# EAGLE board Glove Module (EAGLE 6.6.0)

Size 30 x 60 mm. Coordinates in mm from the lower left corner, seen from the top.
Outline: 14.76,0 2.24,0 arc-90 0,2.24 0,56.84 arc-90 3.16,60 26.39,60 arc-90 30,56.39 30,51 arc-53 26,44 arc88 17,34 17,2.24 arc-90 14.76,0
Copper layers (1*16): Top 0.035mm / dielectric 1.5mm / Bottom 0.035mm
Design rules "default": minimum track width 10mil, minimum drill 24mil, track to track 8mil, track to pad 8mil, pad to pad 8mil, via to via 8mil, smd to smd 8mil, copper to edge 40mil, drill to drill 8mil, minimum pad ring 10mil, minimum via ring 8mil, stop-mask expansion 4mil, vias tented up to drill 0mil, thermal gap 10mil

## Footprints (pad centres in the part's own frame; a part is rotated, then mirrored left to right if it is on the bottom)
1,6/0,9 = drill 0.914 pad 1.6 octagon: 1 0,0
EIA3216 = smd 1.4 x 1.6: A 1.4,0; C -1.4,0
0603-CAP = smd 1.1 x 1: 1 -0.85,0; 2 0.85,0
SOD523 = smd 0.7 x 0.5: A 0.7,0; C -0.6,0
LED-1206-BOTTOM = smd 1.5 x 1.6: A -1.8,0; C 1.8,0 | hole 2.3: 0,0
FIDUCIAL-1X2 = smd 1 x 1: 1 0,0
SOT23-5 = smd 0.55 x 1.1: 1 -0.95,-1.3; 2 0,-1.3; 3 0.95,-1.3; 4 0.95,1.5; 5 -0.95,1.5
SOT223 = smd 1.219 x 2.235: 1 -2.311,-3.099; 2 0,-3.099; 3 2.311,-3.099 | smd 3.6 x 2.2: 4 0,3.099
RFD22301 = smd 3.353 x 0.813: 1 0,0; 2 0,-1.27; 3 0,-2.54; 4 0,-3.81; 5 0,-5.08; 6 0,-6.35; 7 0,-7.62; 8 0,-8.89; 9 13.411,-12.675; 10 13.411,-11.405; 11 13.411,-10.135; 12 13.411,-8.865; 13 13.411,-7.595; 14 13.411,-6.325; 15 13.411,-5.055; 16 13.411,-3.785; 17 13.411,-2.515; 18 13.411,-1.245; 19 13.411,0.025
SSOP24 = smd 0.348 x 1.397: 1 -3.575,-3.656; 2 -2.925,-3.656; 3 -2.275,-3.656; 4 -1.625,-3.656; 5 -0.975,-3.656; 6 -0.325,-3.656; 7 0.325,-3.656; 8 0.975,-3.656; 9 1.625,-3.656; 10 2.275,-3.656; 11 2.925,-3.656; 12 3.575,-3.656; 13 3.575,3.656; 14 2.925,3.656; 15 2.275,3.656; 16 1.625,3.656; 17 0.975,3.656; 18 0.325,3.656; 19 -0.325,3.656; 20 -0.975,3.656; 21 -1.625,3.656; 22 -2.275,3.656; 23 -2.925,3.656; 24 -3.575,3.656
QFN.24.4X4 = smd 0.85 x 0.38: 1 -1.975,1.25; 2 -1.975,0.75; 3 -1.975,0.25; 4 -1.975,-0.25; 5 -1.975,-0.75; 6 -1.975,-1.25; 13 1.975,-1.25; 14 1.975,-0.75; 15 1.975,-0.25; 16 1.975,0.25; 17 1.975,0.75; 18 1.975,1.25 | smd 0.38 x 0.85: 7 -1.25,-1.975; 8 -0.75,-1.975; 9 -0.25,-1.975; 10 0.25,-1.975; 11 0.75,-1.975; 12 1.25,-1.975; 19 1.25,1.975; 20 0.75,1.975; 21 0.25,1.975; 22 -0.25,1.975; 23 -0.75,1.975; 24 -1.25,1.975
USB-B-MICRO-SMD_V03 = smd 1.45 x 0.4: D+1 2.725,0; D-1 2.725,0.65; GND1 2.725,-1.3; ID1 2.725,-0.65; VBUS1 2.725,1.3 | smd 1.5 x 1.8: SHIELD1 0,3.685; SHIELD2 0,-3.685 | smd 1.5 x 2.5: SHIELD3 0,0 | hole 0.85: 2.2,1.9; 2.2,-1.9
SMD1,27-2,54 = smd 1.27 x 2.54: 1 0,0
R0402 = smd 0.7 x 0.9: 1 -0.65,0; 2 0.65,0
R0603 = smd 1 x 1.1: 1 -0.85,0; 2 0.85,0
0603-ARV = smd 0.5 x 0.65: 1 -1.2,-0.625; 2 -0.4,-0.625; 3 0.4,-0.625; 4 1.2,-0.625; 5 1.2,0.625; 6 0.4,0.625; 7 -0.4,0.625; 8 -1.2,0.625
SSOP20_L = smd 0.381 x 1.143: 1 -2.857,-2.68; 2 -2.223,-2.68; 3 -1.587,-2.68; 4 -0.953,-2.68; 5 -0.318,-2.68; 6 0.318,-2.68; 7 0.953,-2.68; 8 1.587,-2.68; 9 2.223,-2.68; 10 2.857,-2.68; 11 2.857,2.68; 12 2.223,2.68; 13 1.587,2.68; 14 0.953,2.68; 15 0.318,2.68; 16 -0.318,2.68; 17 -0.953,2.68; 18 -1.587,2.68; 19 -2.223,2.68; 20 -2.857,2.68

## Placement (x,y rotation side)
BAT+  Bat+  [1,6/0,9]  15.56,7.72 0 top
BAT-  Bat-  [1,6/0,9]  15.61,4.02 0 top
C1  10uF  [EIA3216]  2.08,3.68 90 top
C2  10uF  [EIA3216]  13.83,13.8 0 top
C3  10uF  [EIA3216]  8.25,50.28 90 top
C5  0.1uF  [0603-CAP]  18.2,56.43 90 top
C6  0.1uF  [0603-CAP]  10.43,27.15 180 top
C8  0.1uF  [0603-CAP]  3.9,7.96 0 top
C9  0.1uF  [0603-CAP]  17.61,41.71 270 top
C10  2.2uF  [0603-CAP]  -6,36 0 top  (outside the outline)
C11  0.1uF  [0603-CAP]  -6,32 0 top  (outside the outline)
C12  10uF  [EIA3216]  -6,27 0 top  (outside the outline)
C13  2.2uF  [0603-CAP]  25.6,47.55 90 top
C14  0.1uF  [0603-CAP]  25.55,51.7 270 top
D1  [SOD523]  12.49,11.07 0 top
D2  500mA  [SOD523]  -6,12 0 top  (outside the outline)
D3  Green  [LED-1206-BOTTOM]  -6,9 0 top  (outside the outline)
D4  Green  [LED-1206-BOTTOM]  14.75,20.5 90 top
D5  Green  [LED-1206-BOTTOM]  11.25,20.45 90 top
FID1  FIDUCIAL1X2  [FIDUCIAL-1X2]  16,11 0 top
FID2  FIDUCIAL1X2  [FIDUCIAL-1X2]  28,55 0 top
FID3  FIDUCIAL1X2  [FIDUCIAL-1X2]  1,8 0 top
IC1  MCP73831  [SOT23-5]  12.6,7.79 0 top
IC2  LM340S  [SOT223]  4.65,22.69 90 top
IC3  RF22301  [RFD22301]  14.95,43.55 270 top
IC4  MUX-74HC4067SMD  [SSOP24]  14.56,49.94 0 top
IC5  MPU-6050  [QFN.24.4X4]  21.45,50.91 0 top
JP1  uUSB Conn  [USB-B-MICRO-SMD_V03]  8.65,2.05 90 top
PAD3  WIREPADSMD1,27-254  [SMD1,27-2,54]  4,49 270 bottom
PAD4  WIREPADSMD1,27-254  [SMD1,27-2,54]  4,51 270 bottom
PAD5  WIREPADSMD1,27-254  [SMD1,27-2,54]  4,56 0 bottom
PAD6  WIREPADSMD1,27-254  [SMD1,27-2,54]  7,56 0 bottom
PAD7  WIREPADSMD1,27-254  [SMD1,27-2,54]  22,56 0 bottom
PAD8  WIREPADSMD1,27-254  [SMD1,27-2,54]  25,56 0 bottom
PAD9  WIREPADSMD1,27-254  [SMD1,27-2,54]  25,57 0 top
PAD10  WIREPADSMD1,27-254  [SMD1,27-2,54]  22,57 0 top
PAD11  WIREPADSMD1,27-254  [SMD1,27-2,54]  7,57 0 top
PAD12  WIREPADSMD1,27-254  [SMD1,27-2,54]  4,57 0 top
PAD13  WIREPADSMD1,27-254  [SMD1,27-2,54]  3,51 90 top
PAD14  WIREPADSMD1,27-254  [SMD1,27-2,54]  3,49 90 top
R1  10k  [R0402]  15.09,2.04 180 top
R2  27E  [R0603]  6.79,8.32 90 top
R3  27E  [R0603]  8.99,8.4 90 top
R4  10k  [R0402]  -6,20 0 top  (outside the outline)
R5  27E  [R0603]  -6,16 180 top  (outside the outline)
R6  330E  [0603-ARV]  13.85,27.15 0 top
R7  [0603-ARV]  14,57 0 top
R8  10k  [R0402]  21.05,47.15 0 top
R9  10k  [R0402]  21,46 180 top
R10  [0603-ARV]  10,57 0 top
U1  FTS31XS-U  [SSOP20_L]  5.79,14.47 0 top

## Library data of the parts
BAT+ BAT- PAD3-PAD14 = wirepad
C1-C3 C12 = SparkFun-Capacitors; PROD_ID: CAP-00811
C5 C6 C8-C11 C13 C14 = SparkFun-Capacitors; PROD_ID: CAP-08604
D1 D2 = diode
D3-D5 = SparkFun-LED; PROD_ID: DIO-11076
FID1-FID3 = SparkFun-Aesthetics
IC1 IC3 = GeekAmmo
IC2 = linear
IC4 = SparkFun-AnalogIC
IC5 = MPU6050
JP1 = SparkFun-Connectors; PROD_ID: CONN-11752
R1 R4 R8 R9 = rcl
R2 R3 R5 = resistor
R6 R7 R10 = SparkFun-Passives
U1 = SparkFun-DigitalIC; PROD_ID: IC-11524

## Nets
+5V: C1.A IC1.4 IC2.1 JP1.VBUS1
ACOM: IC3.5 IC4.1
GND: BAT-.1 C1.C C2.C C3.C C5.2 C6.2 C8.2 C13.2 C14.2 D5.C IC1.1 IC1.2 IC2.2 IC2.4 IC3.1 IC3.2 IC3.8 IC3.9 IC3.10 IC3.12 IC3.18 IC3.19 IC4.12 IC4.13 IC4.15 IC5.9 IC5.18 JP1.GND1 JP1.SHIELD1 JP1.SHIELD2 JP1.SHIELD3 PAD3.1 PAD4.1 PAD5.1 PAD6.1 PAD7.1 PAD8.1 R1.1 U1.6 U1.16
N$1: C9.1 U1.1
N$2: JP1.D-1 R3.2
N$3: IC1.5 R1.2
N$4: JP1.D+1 R2.2
N$5: D5.A R6.1
N$6: D4.A R6.2
N$8: BAT+.1 D1.A IC1.3
N$9: IC4.9 PAD14.1 R7.1
N$10: C14.1 IC5.10
N$11: C13.1 IC5.20
N$12: IC4.8 PAD13.1 R7.2
N$13: IC4.7 PAD12.1 R7.3
N$14: IC4.6 PAD11.1 R7.4
N$15: IC4.5 PAD10.1 R10.1
N$16: IC4.4 PAD9.1 R10.2
RST/: C9.2 IC3.14
RX/SO: IC3.17 IC4.10 U1.4
S1: IC3.3 IC4.11
S2: IC3.4 IC4.14
SCL: IC3.7 IC5.23 R9.1
SDA: IC3.6 IC5.24 R8.1
TX/LED: D4.C IC3.16 U1.20
USB-NEG: R3.1 U1.12
USB-POS: R2.1 U1.11
VCC: C2.A C3.A C5.1 C6.1 C8.1 D1.C IC2.3 IC3.13 IC4.24 IC5.13 R6.7 R6.8 R7.5 R7.6 R7.7 R7.8 R8.2 R9.2 R10.7 R10.8 U1.3 U1.13 U1.14 U1.15

## Tracks (layer width: path | path; a pad name or v marks a point on that pad's centre or on a via)
+5V  (3 unrouted)
ACOM  (1 unrouted)
GND  (39 unrouted)
N$1  (1 unrouted)
N$2  (1 unrouted)
N$3  (1 unrouted)
N$4  (1 unrouted)
N$5  (1 unrouted)
N$6  (1 unrouted)
N$8  (2 unrouted)
N$9  (2 unrouted)
N$10  (1 unrouted)
N$11  (1 unrouted)
N$12  (2 unrouted)
N$13  (2 unrouted)
N$14  (2 unrouted)
N$15  (2 unrouted)
N$16  (2 unrouted)
RST/  (1 unrouted)
RX/SO  (2 unrouted)
S1  (1 unrouted)
S2  (1 unrouted)
SCL  (2 unrouted)
SDA  (2 unrouted)
TX/LED  (2 unrouted)
USB-NEG  (1 unrouted)
USB-POS  (1 unrouted)
VCC  (23 unrouted)

## Text on the board
Measures: Glove Module | All measurements in mm